# Altium PCB SY8502.PcbDoc
Units mm, origin at the board's own origin, x right, y up, seen from the top; angles counter-clockwise.
Board outline 48.77 x 24.29 mm, 2 copper layers (Top Layer, Bottom Layer), stack 1.611 mm thick; 23 components, 13 nets, 62 pads, 105 vias.
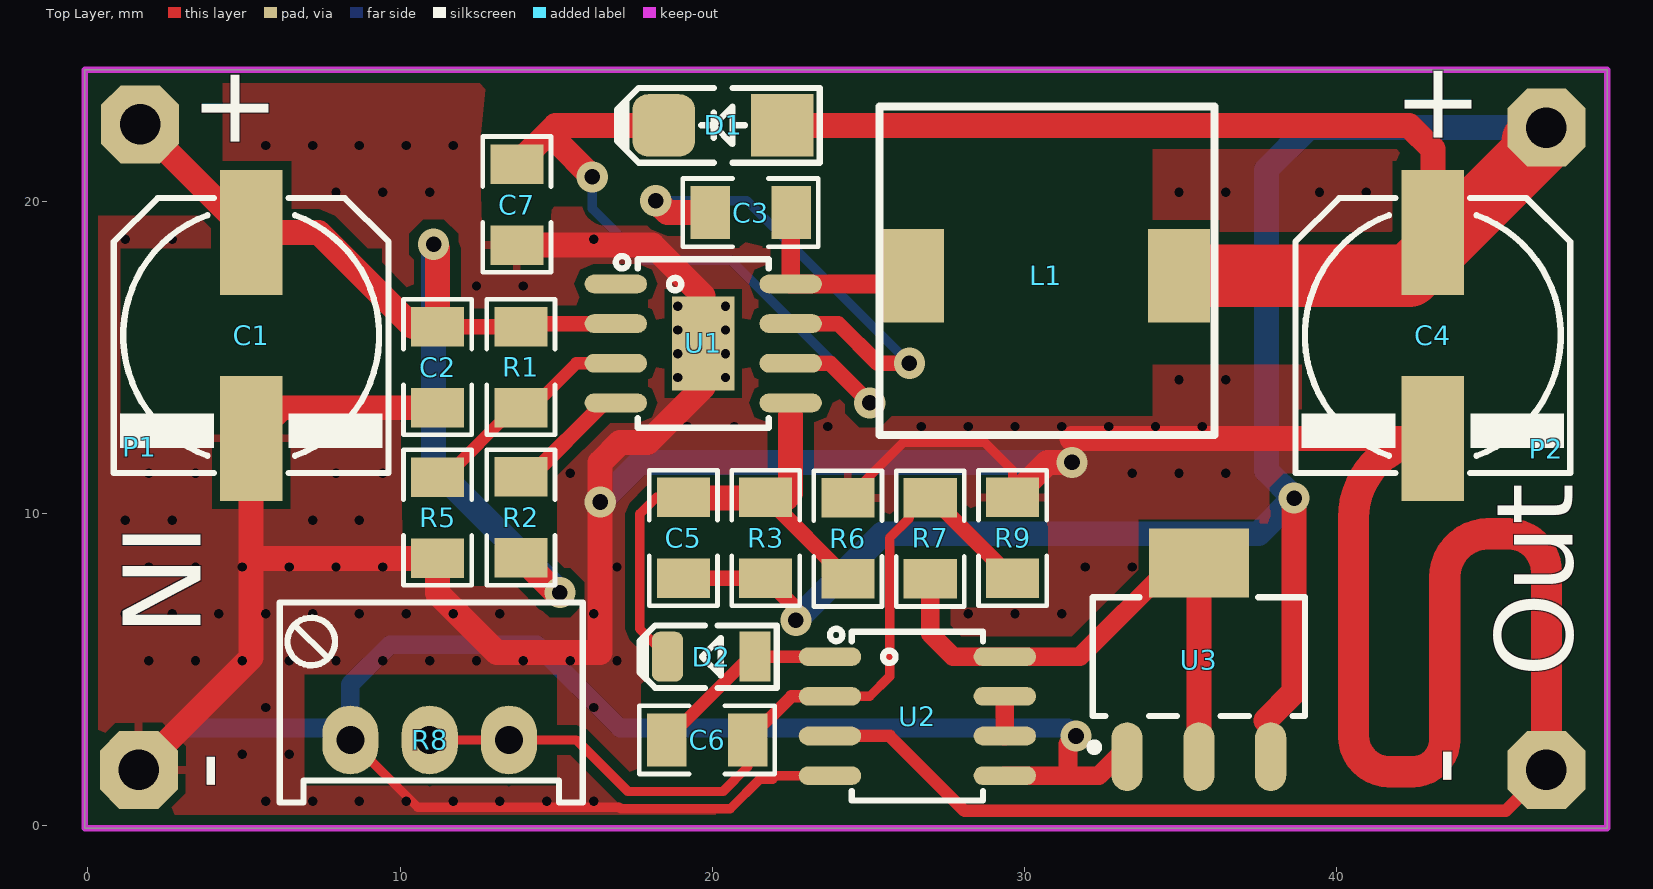
[diagram p0: Top Layer view]
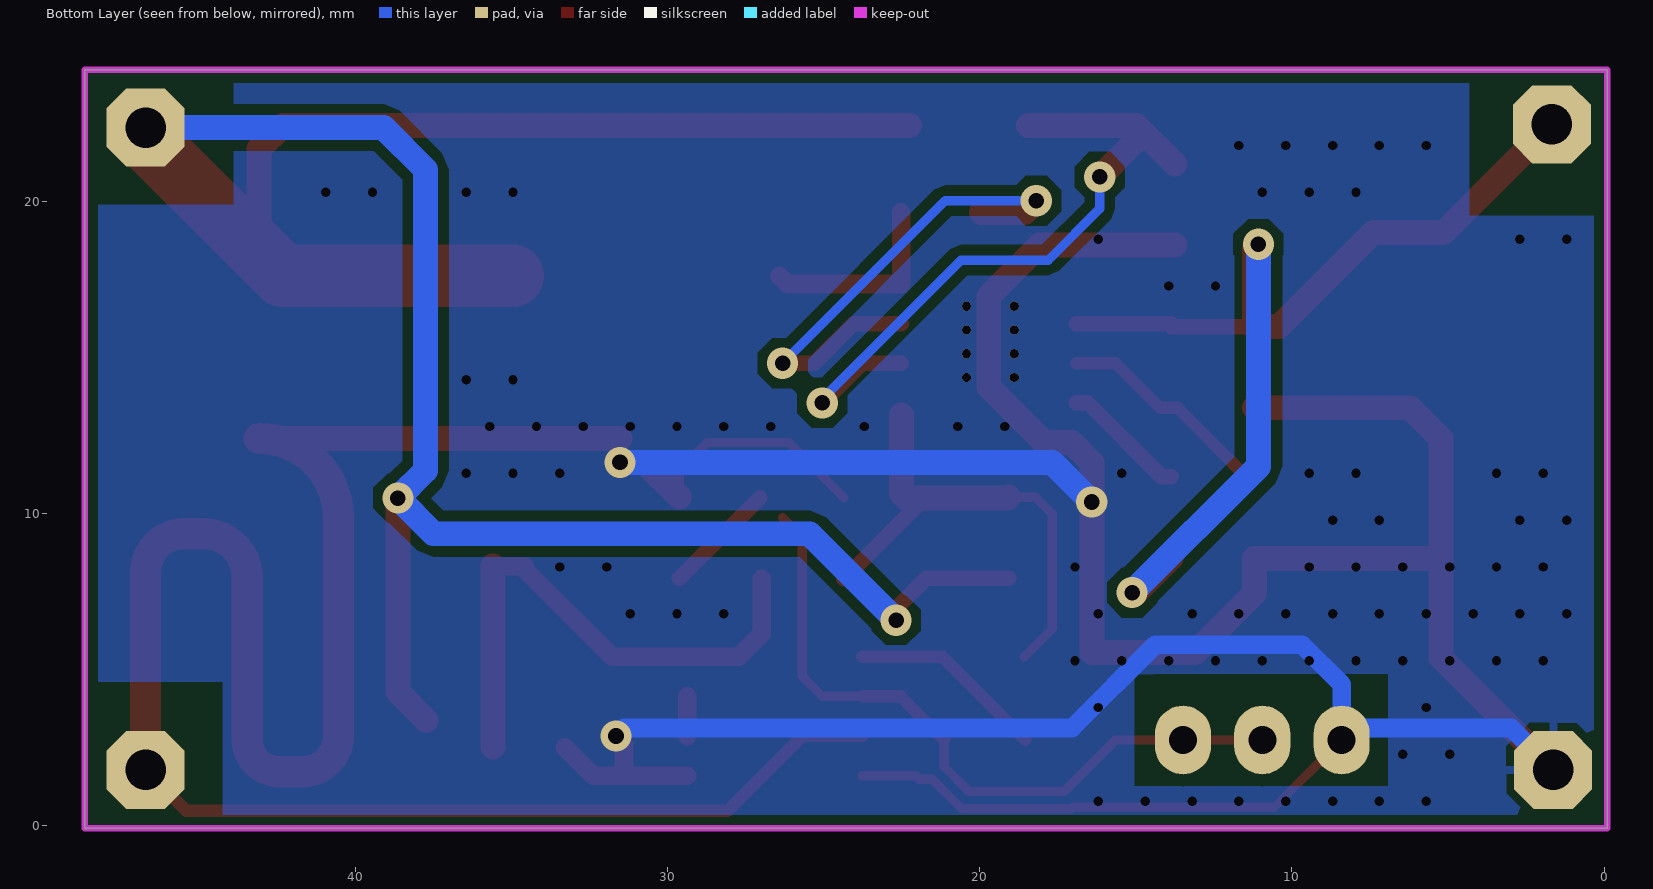
[diagram p1: Bottom Layer view, seen from below]
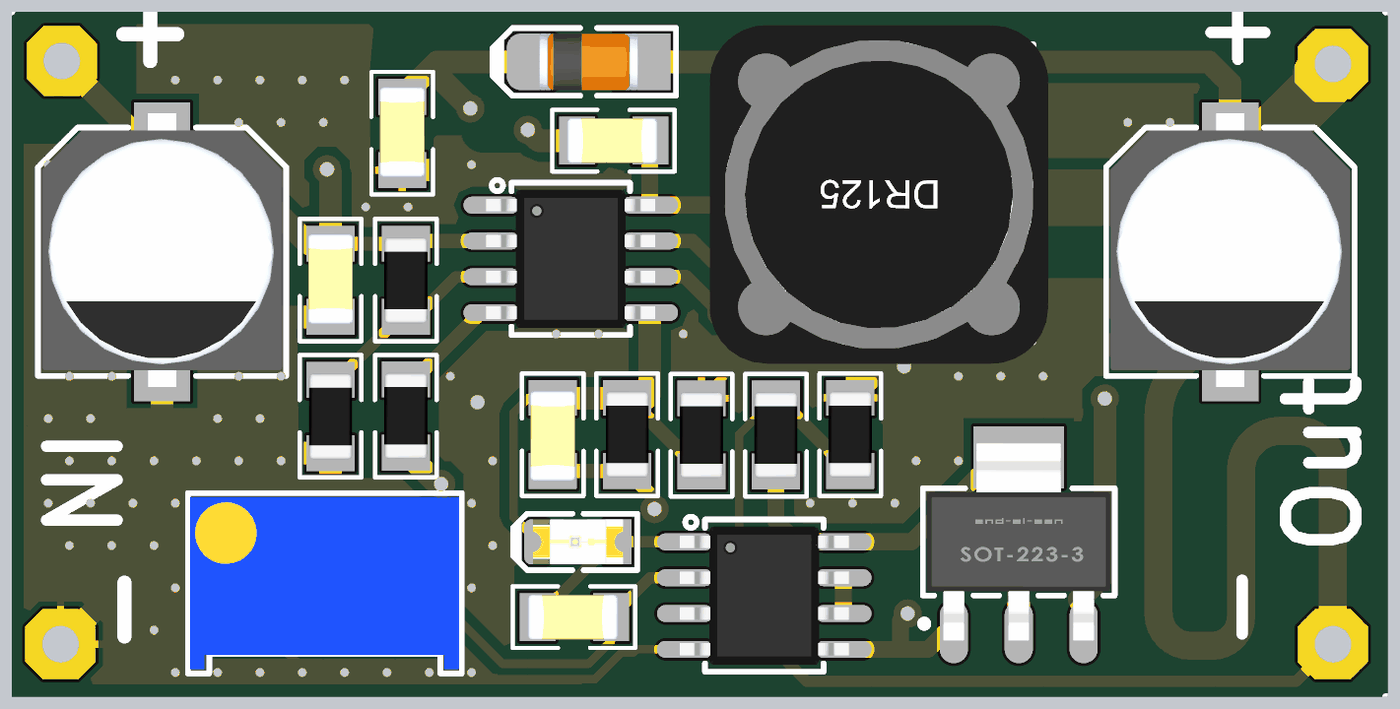
[diagram p2: 3D render of the assembled board from above, using the file's embedded part models]

## Layer stack, top to bottom
Top Solder: solder mask 0.0102, Solder Resist, Dk 3.5
Top Layer: signal copper 0.0356
Dielectric 1: dielectric 1.54, FR-4, Dk 4.8
Bottom Layer: signal copper 0.0356
Bottom Solder: solder mask 0.0102, Solder Resist, Dk 3.5

## Board outline
-0.102,-0.083 -0.102,24.206 48.666,24.206 48.666,-0.083

## Design rules (kind name [scope] priority, off if disabled: settings)
Clearance [All] p1: gap=0.3 ignorepadtopadclearanceinfootprint=FALSE
PlaneConnect [All] p1: pad.planeconnectstyle=Relief pad.reliefexpansion=0.508 pad.reliefentries=4 pad.reliefconductorwidth=0.254 pad.reliefairgap=0.254 via.planeconnectstyle=Direct via.reliefexpansion=0.508 via.reliefentries=4 via.reliefconductorwidth=0.254 via.reliefairgap=0.254
PolygonConnect PolygonConnect_2 [All vs IsNamedPolygon('GND')] p1: thpad.connectstyle=Relief thpad.reliefconductorwidth=0.254 thpad.reliefentries=4 thpad.polygonreliefangle="90 Angle" thpad.airgapwidth=0.254 smdpad.connectstyle=Relief smdpad.reliefconductorwidth=0.254 smdpad.reliefentries=4 smdpad.polygonreliefangle="90 Angle" smdpad.airgapwidth=0.254 via.connectstyle=Direct via.reliefconductorwidth=0.254 via.reliefentries=4 via.polygonreliefangle="90 Angle" via.airgapwidth=0.254
PolygonConnect PolygonConnect_1 [All vs IsNamedPolygon('GND')] p2: thpad.connectstyle=Relief thpad.reliefconductorwidth=0.254 thpad.reliefentries=4 thpad.polygonreliefangle="90 Angle" thpad.airgapwidth=0.254 smdpad.connectstyle=Relief smdpad.reliefconductorwidth=0.254 smdpad.reliefentries=4 smdpad.polygonreliefangle="90 Angle" smdpad.airgapwidth=0.254 via.connectstyle=Direct via.reliefconductorwidth=0.254 via.reliefentries=4 via.polygonreliefangle="90 Angle" via.airgapwidth=0.254
PolygonConnect [All] p3: connectstyle=Relief reliefconductorwidth=0.254 reliefentries=4 polygonreliefangle="90 Angle" airgapwidth=0.254
RoutingVias [All] p1: holewidth=0.711 width=1.27 viastyle="Through Hole" minholewidth=0.711 minwidth=1.27 maxholewidth=0.711 maxwidth=1.27
SolderMaskExpansion [All] p1: expansion=0.102 istentingtop=FALSE
Width [All] p1: maxlimit=2 minlimit=0.3 preferedwidth=0.8
29 further rules are at their usual default settings.

## Components (designator, comment, footprint, x,y, rotation, side; value= is the part's Value field where it differs from the comment)
C1 "100uF/100V" C_EL_8 5.232,15.697 r270 top
C2 "100nF/100V" 1206-Cap-S 11.201,14.681 r0 top
C3 "100nF" 1206-Cap-S 21.234,19.634 r90 top
C4 "470uF/16V" C_EL_8 43.078,15.697 r270 top
C5 "47pF" 1206-Cap-S 19.075,9.22 r180 top
C6 "100pF" 1206-Cap-S 19.837,2.743 r90 top
C7 "100nF" 1206-Cap-S 13.741,19.888 r0 top
D1 "Diode 1N4148" D1808 20.345,22.428 r180 top
D2 "LED0" LED1206GRN 19.967,5.41 r180 top
L1 "68uH" Bobin_smd_10*10 31.14,18.11 r180 top
P1 "Input" HDR1X2#1 1.422,7.315 r90 top
P2 "Input" HDR1X2#2 46.507,8.331 r90 top
R1 "100K" 1206-Res-S 13.868,14.681 r0 top
R2 "1.8M" 1206-Res-S 13.868,9.875 r180 top
R3 "18K" 1206-Res-S 21.711,9.22 r180 top
R5 "NA" 1206-Res-S 11.201,9.855 r0 top
R6 "2K" 1206-Res-S 24.346,9.2 r180 top
R7 "470K" 1206-Res-S 26.981,9.2 r180 top
R8 "RPot" POT_3296W 10.947,2.743 r0 top value=10K
R9 "NA" 1206-Res-S 29.616,9.22 r180 top
U1 "SY8502" SO_8T 19.71,15.443 r0 top
U2 "LM358D" SO_8 26.568,3.505 r0 top
U3 "LM1117IMP-5.0" SOT223_4 35.585,5.41 r90 top

## Footprints (in the part's own frame and the unit in brackets; to place one, negate y for a bottom-side part, rotate by r counter-clockwise, add the part's x,y. Pads: shape width x height; smd on the part's side, far side on the other; paste and mask are expansions set on the pad)
1206-Cap-S [mm]
  rect 1.7x1.27 smd: 1(0,-1.298) 2(0,1.298)
  silkscreen extent -1.09,-2.16 1.09,2.18, body extent -0.8,-1.55 0.8,1.65, height 0.94
1206-Res-S [mm]
  rect 1.7x1.27 smd: 1(0,-1.298) 2(0,1.298)
  silkscreen extent -1.09,-2.16 1.09,2.18, body extent -0.76,-1.52 0.76,1.52, height 0.6
Bobin_smd_10*10 [mm]
  rect 2x3 smd: 1(4.722,0.501) 2(-3.808,0.501)
  silkscreen extent -4.94,-4.92 5.79,5.6, body extent -5.49,-5.62 6.51,6.38, height 5.92
C_EL_8 [mm] "Electrolytic Cap, Size E, Size F, 8.3X10"
  rect 4x2 smd: 1(-3.3,0) 2(3.3,0)
  Top Layer pour cut-out: 2.794,4.191 2.794,-4.191 -2.794,-4.191 -2.794,4.191
  silkscreen extent -4.4,-4.4 4.4,4.4, body extent -4.9,-4.25 4.8,4.25, height 10.3
D1808 [mm] "MELF, DIOD1810, SOD-87"
  rect 2x2 smd: 1(-1.9,0)
  rrect50% 2x2 smd: 2(1.9,0)
  Top Layer pour cut-out: -1.3,1.27 1.3,1.27 1.3,-1.27 -1.3,-1.27
  silkscreen extent -3.1,-1.2 3.4,1.2, body extent -1.75,-1 1.75,1, height 2
HDR1X2#1 [mm] "Connector; Header; 2 Position"
  oct 2.5x2.5 hole 1.3: 1(-5.533,-0.21) 2(15.145,-0.254)
HDR1X2#2 [mm] "Connector; Header; 2 Position"
  oct 2.5x2.5 hole 1.3: 1(-6.549,-0.21) 2(14.025,-0.21)
LED1206GRN [mm] "LED, 1206, GREEN"
  rect 1x1.6 smd mask+0.075: 1(-1.4,0)
  rrect50% 1x1.6 smd mask+0.075: 2(1.4,0)
  Top Layer pour cut-out: -1.1,1.1 -1.1,-1.1 1.1,-1.1 1.1,1.1
  silkscreen extent -2.1,-1 2.3,1, body extent -1.6,-0.8 1.6,0.8, height 0.68
POT_3296W [mm] "POT, TRIM, 10.0X5.0mm, pitch: 2.5mm 3299W 3296W S64W"
  oval 1.8x2.2 hole 0.9: 1(-2.54,0) 2(0,0) 3(2.54,0)
  silkscreen extent -4.8,-2 4.9,4.4, body extent -4.73,-1.85 4.8,4.25, height 11.56
SO_8 [mm] "SOP-8, 5x3.9mm body 1.27mm pitch, SOT96-1, M08A, S8, SOIC8, VO8, MS-012AA(JEDEC), R-8, 8S2, VOG8"
  oval 2x0.6 smd: 1(-2.8,1.905) 2(-2.8,0.635) 3(-2.8,-0.635) 4(-2.8,-1.905) 5(2.8,-1.905) 6(2.8,-0.635) 7(2.8,0.635) 8(2.8,1.905)
  silkscreen extent -2.8,-2.7 2.1,2.8, body extent -3,-2.45 3,2.45, height 1.7
SO_8T [mm] "SOP-8, 5x3.9mm body 1.27mm pitch, DDA, SO PowerPAD"
  oval 2x0.6 smd: 1(-2.8,1.905) 2(-2.8,0.635) 3(-2.8,-0.635) 4(-2.8,-1.905) 5(2.8,-1.905) 6(2.8,-0.635) 7(2.8,0.635) 8(2.8,1.905)
  rect 2x3 smd mask+0.1: 9(0,0)
  silkscreen extent -2.8,-2.7 2.1,2.8, body extent -3,-2.45 3,2.45, height 1.7
SOT223_4 [mm] "SOT223, 4-Leads, Body 6.5x3.5mm, Pitch 2.30mm"
  oval 2.2x1 smd: 1(-3.2,2.3) 2(-3.2,0) 3(-3.2,-2.3)
  rect 2.2x3.2 smd: 4(3,0)
  Top Layer pour cut-out: -1.7,3.556 1.7,3.556 1.7,-3.556 -1.7,-3.556
  silkscreen extent -3.02,-3.4 1.9,3.47, body extent -3.5,-3.25 3.5,3.25, height 1.7

## Part data
C1 C4: library part "Cap Pol1", "Polarized Capacitor (Radial)", LatestRevisionDate=17-Jul-2002, LatestRevisionNote="Re-released for DXP Platform.", PackageDescription="Polarized Capacitor (Radial); 2 Leads", PackageReference=RB7.6-15, Published=8-Jun-2000, Publisher="Altium Limited"
C2 C3 C5 C6 C7: library part Cap, "Capacitor", LatestRevisionDate=17-Jul-2002, LatestRevisionNote="Re-released for DXP Platform.", PackageDescription="Radial Cap, Thru-Hole; 2 Leads; 0.3 in Pin Spacing", PackageReference=RAD-0.3, Published=8-Jun-2000, Publisher="Altium Limited"
D1: "High Conductance Fast Diode", Code_JEDEC=DO-204-AH, ComponentLink1Description="Manufacturer Link", ComponentLink1URL=http://www.fairchildsemi.com/, ComponentLink2Description=Datasheet, ComponentLink2URL=http://www.fairchildsemi.com/ds/1N%2F1N4148.pdf, DatasheetVersion=1997, LatestRevisionDate=17-Jul-2002, LatestRevisionNote="Re-released for DXP Platform.", PackageDescription="Diode, Axial; Body 3.8 x 1.9 mm (LxDia. max), Lead Dia. 0.53 mm (max)", PackageReference=DO-35, Published=8-Jun-2000, Publisher="Altium Limited"
D2: "Typical INFRARED GaAs LED", LatestRevisionDate=08-Jul-2005, LatestRevisionNote="Mech Layer 1 removed.", PackageDescription="LED; 2 Leads", PackageReference=LED-0, Published=8-Jun-2000, Publisher="Altium Limited"
L1: library part Inductor, "Inductor", Code_IEC=1005, Code_JEITA=0402, LatestRevisionDate=29-May-2009, LatestRevisionNote="IPC-7351 Footprint Added.", PackageDescription="Chip Inductor", PackageReference=0402-A, Published=8-Jun-2000, Publisher="Altium Limited"
P1 P2: library part "Header 2", "Header, 2-Pin", LatestRevisionDate=17-Jul-2002, LatestRevisionNote="Re-released for DXP Platform.", Publisher="Altium Limited"
R1 R2 R3 R5 R6 R7 R9: library part Res1, "Resistor", LatestRevisionDate=17-Jul-2002, LatestRevisionNote="Re-released for DXP Platform.", PackageDescription="Axial Device, Thru-Hole; 2 Leads; 0.3 in Pin Spacing", PackageReference=AXIAL-0.3, Published=8-Jun-2000, Publisher="Altium Limited"
R8: "Potentiometer", LatestRevisionDate=17-Jul-2002, LatestRevisionNote="Re-released for DXP Platform.", PackageDescription="Variable Resistor, Thru-Hole; 3 Leads", PackageReference=VR5, Published=8-Jun-2000, Publisher="Altium Limited", Set Position=0.5, Sim Note="Enter the Resistance value and the set point into parameter fields."
U1: "Step Down Regulator"
U2: "Dual Low-Power Operational Amplifier", Code_IPC=SOIC127P600-8, Code_JEDEC=MS-012-AA, ComponentLink1Description="Manufacturer Link", ComponentLink1URL=http://www.onsemi.com/site/products/parametrics/0,4446,251,00.html, ComponentLink2Description=Datasheet, ComponentLink2URL=http://www.onsemi.com/pub/Collateral/LM358-D.PDF, DatasheetVersion=1988, LatestRevisionDate=13-Apr-2006, LatestRevisionNote="IPC-7351 Footprint Added.", PackageDescription="8-Pin Small Outline Integrated Circuit 1.27 mm Pitch", PackageReference=751-02, Published=17-Jul-2002, Publisher="Altium Limited"
U3: "800mA Low-Dropout Linear Regulator, 4-pin SOT-223", Manufacturer="National Semiconductor", PackageTopMarking=XYTT*N06B, PowerWise=N, Supplier Part Number 1=7614135, Code_IPC=SOT223-4, Code_JEDEC=TO-261-AA, ComponentLink1Description="LM1117 Datasheet", ComponentLink1URL=http://www.national.com/ds/LM/LM1117.pdf, ComponentLink2Description="LM1117 Web Page", ComponentLink2URL=http://www.national.com/pf/LM/LM1117.html, ComponentLink3Description="MP04A Package Page", ComponentLink3URL=http://www.national.com/packaging/folders/mp04a.html, CompType="LDO IC", DatasheetVersion=Apr-2006, PackageDescription="Molded SOT-223, 6.50 x 3.56 x 1.6mm Body, 4 Lead, 2.3mm Pitch", PackageReference=MP04A, PackageVersion="revB, Apr-2003", PartNumber=LM1117IMP-5.0, PinCount=4, Published=4-Dec-2008, Publisher="Altium Limited", RoHS=N, Supplier 1=Farnell

## Via types
v1: diameter 0/0 (per signal layer), hole 0.3, Top Layer to Bottom Layer, tented both sides, 86 vias
v2: diameter 1, hole 0.5, Top Layer to Bottom Layer, tented both sides, 11 vias
v3: diameter 0.3, hole 0.3, Top Layer to Bottom Layer, tented both sides, 8 vias

## Nets (pads, with @x,y where several pads share a name; then routed paths per layer and width w, separated by ;. In a path a pad name is that pad's centre, name@x,y a point inside that pad or via, vN(x,y) a via of type N, cw(c..) or ccw(c..) an arc to the next point about the centre after c; other vN are vias at no path point)
+5V: R7.2 U2.8 U3.2 U3.4 | length 17.7
  Top Layer w0.6: R7.2 26.981,6.14 27.711,5.41 U2.8 31.775,5.41 34.675,8.31 U3.4@35.585,8.31
  Top Layer w0.8: U3.2@35.585,2.51 U3.4@35.585,8.31
+Vout: C4.1 C5.2 D1.1 L1.2 P2.2 R3.2 U3.3 | length 88.3
  Top Layer w0.5: C5.2 R3.2 22.631,7.001 22.631,6.553 22.653,6.574 v2(22.678,6.574)
  Top Layer w0.8: D1.1 42.316,22.428 43.078,21.666 C4.1 ; 37.727,3.368 38.633,4.274 v2(38.633,10.49)
  Top Layer w2: L1.2 42.325,17.609 46.717,22.001 P2.2 P2.2@46.281,21.92
  Bottom Layer w0.8: v2(22.678,6.574) 25.451,9.347 37.49,9.347 v2(38.633,10.49) 37.744,11.379 37.744,21.006 39.095,22.357 P2.2
GND: C1.2 C2.1 C4.2 C7.1 P1.1 P2.1 R5.1 R6.1 R8.1 R9.1 U1.9 U2.3 U2.4 U2.5 U3.1 | length 200.8
  Top Layer w0.3: R8.1 10.566,0.584 17.022,0.584 17.068,0.538 20.575,0.538 21.526,1.489 21.938,1.489 22.049,1.6 U2.4 ; R6.1 26.116,12.268 28.727,12.268 29.616,11.379 R9.1
  Top Layer w0.4: U2.3 25.679,2.87 28.078,0.471 45.406,0.471 P2.1
  Top Layer w0.6: U2.5 31.394,1.6 ; v2(31.648,2.87) 31.394,2.616 31.394,1.6 ; U3.1@33.285,2.51 32.375,1.6 31.394,1.6
  Top Layer w0.8: P1.1 5.232,5.383 5.232,8.714 ; C2.1 6.218,13.383 C1.2 5.232,8.714 ; C7.1 18.087,18.59 19.71,16.967 U1.9 19.71,14.046 17.932,12.268 17.043,12.268 16.408,11.633 v2(16.408,10.363) 16.408,5.537 13.106,5.537 11.201,7.442 R5.1 5.389,8.557 5.232,8.714 ; R9.1 30.731,11.633 v2(31.521,11.633) ; 31.521,12.397 C4.2
  Top Layer w1: C4.2 ccw(c43.078,9.857) 40.538,9.857 40.538,2.87 ccw(c41.681,2.87) 41.681,1.727 42.443,1.727 ccw(c42.443,2.743) 43.459,2.743 43.459,7.95 cw(c44.856,7.95) 44.856,9.347 45.491,9.347 cw(c45.491,8.121) 46.717,8.121 P2.1
  Bottom Layer w0.6: P1.1 2.974,3.124 R8.1@8.407,3.124 ; R8.1 R8.1@8.407,3.124 ; v2(31.648,2.87) 31.394,3.124 17.043,3.124 14.376,5.791 9.677,5.791 8.407,4.521 R8.1@8.407,3.124
  Bottom Layer w0.8: v2(16.408,10.363) 17.678,11.633 v2(31.521,11.633)
  other v1: 5.697,0.781 7.197,0.781 8.697,0.781 10.197,0.781 11.697,0.781 13.197,0.781 14.697,0.781 16.197,0.781 4.947,2.281 6.447,2.281 5.697,3.781 16.197,3.781 1.947,5.281 3.447,5.281 4.947,5.281 6.447,5.281 7.947,5.281 9.447,5.281 10.947,5.281 12.447,5.281 13.947,5.281 15.447,5.281 16.947,5.281 1.197,6.781 2.697,6.781 4.197,6.781 5.697,6.781 7.197,6.781 8.697,6.781 10.197,6.781 11.697,6.781 13.197,6.781 16.197,6.781 28.197,6.781 29.697,6.781 31.197,6.781 1.947,8.281 3.447,8.281 4.947,8.281 6.447,8.281 7.947,8.281 9.447,8.281 16.947,8.281 31.947,8.281 33.447,8.281 1.197,9.781 2.697,9.781 7.197,9.781 8.697,9.781 1.947,11.281 3.447,11.281 7.947,11.281 9.447,11.281 15.447,11.281 33.447,11.281 34.947,11.281 36.447,11.281 19.197,12.781 20.697,12.781 23.697,12.781 26.697,12.781 28.197,12.781 29.697,12.781 31.197,12.781 32.697,12.781 34.197,12.781 35.697,12.781 34.947,14.281 36.447,14.281 12.447,17.281 13.947,17.281 1.197,18.781 2.697,18.781 16.197,18.781 7.947,20.281 9.447,20.281 10.947,20.281 34.947,20.281 36.447,20.281 39.447,20.281 40.947,20.281 5.697,21.781 7.197,21.781 8.697,21.781 10.197,21.781 11.697,21.781
  other v3: 18.898,14.351 20.422,14.351 18.898,15.113 20.422,15.113 18.898,15.875 20.422,15.875 18.898,16.637 20.422,16.637
NetC3_1: C3.1 L1.1 U1.8 | length 6.3
  Top Layer w0.6: C3.1 22.51,19.612 U1.8 26.158,17.348 L1.1
NetC3_2: C3.2 U1.7 | length 16.5
  Top Layer w0.5: U1.7 24.028,16.078 25.298,14.808 v2(26.314,14.808)
  Top Layer w0.8: v2(18.186,20.015) 18.567,19.634 C3.2
  Bottom Layer w0.3: v2(18.186,20.015) 21.107,20.015 v2(26.314,14.808)
NetC5_1: C5.1 D2.2 R3.1 R6.2 U1.5 | length 16.3
  Top Layer w0.3: D2.2 17.678,6.299 17.678,9.982 18.214,10.518 C5.1 ; R3.1 21.73,10.518 R3.1@21.75,10.498
  Top Layer w0.5: R3.1@21.75,10.498 R6.2
  Top Layer w0.8: C5.1 19.096,10.498 21.75,10.498 22.377,10.498 22.51,10.631 22.51,13.157
NetC6_1: C6.1 R7.1 R8.2 R8.3 R9.2 U2.2 | length 26.5
  Top Layer w0.3: R8.2 15.646,2.743 17.297,1.092 20.345,1.092 21.135,1.882 C6.1 ; U2.2 25.044,4.14 25.679,4.775 25.679,9.22 26.314,9.855 ; R7.1 R7.1@27.041,10.498
  Top Layer w0.4: C6.1 22.532,4.14 U2.2
  Top Layer w0.5: R7.1@27.041,10.498 R9.2
NetC6_2: C6.2 D2.1 U2.1 | length 6.3
  Top Layer w0.4: C6.2 21.206,5.41 D2.1 U2.1
NetC7_2: C7.2 D1.2 U1.6 | length 23
  Top Layer w0.5: U1.6 23.774,14.808 v2(25.044,13.538)
  Top Layer w0.8: C7.2 14.983,22.428 ; v2(16.154,20.777) 14.983,21.948 14.983,22.428 ; D1.2 14.983,22.428
  Bottom Layer w0.3: v2(16.154,20.777) 16.154,19.761 17.805,18.11 20.599,18.11 24.917,13.792 24.917,13.665 v2(25.044,13.538)
NetR1_1: R1.1 R5.2 U1.3 | length 7.2
  Top Layer w0.4: R5.2 11.433,11.153 13.663,13.383 R1.1 14.221,13.383 15.646,14.808 U1.3
NetR2_1: R2.1 U1.4 | length 4
  Top Layer w0.5: R2.1 14.171,11.173 16.535,13.538 U1.4
NetU2_6: U2.6 U2.7 | length 1.3
  Top Layer w0.6: U2.6 U2.7
VCC: C1.1 C2.2 P1.2 R1.2 R2.2 U1.2 | length 35.2
  Top Layer w0.5: C2.2 R1.2 ; R1.2@13.868,16.078 U1.2
  Top Layer w0.8: P1.2 5.138,18.997 C1.1 7.393,18.997 10.411,15.979 C2.2 11.201,18.491 v2(11.074,18.618) ; R2.2 14.985,7.461 v2(15.119,7.461)
  Bottom Layer w0.8: v2(11.074,18.618) 11.074,11.506 v2(15.119,7.461)
pads on no net: U1.1

## Polygon pours and split planes (outlines as drawn)
GND on Bottom Layer "GND" (solid, remove dead copper, pour order 1): 48.59,24.13 0.051,24.13 0.051,0 48.666,0 48.666,-0.152
GND on Top Layer "GND" (solid, remove dead copper, pour order 0): 48.59,24.206 48.59,0 0,0 0,24.206

## Keep-outs
Keep-Out Layer:
  the board outline again, w0.2

## Other copper
Top Layer:
  pour cut-out: 15.823,19.977 ccw(c16.585,19.977) 16.585,19.215 17.855,19.215 ccw(c17.855,19.242) 17.882,19.242 17.882,20.599 ccw(c17.374,20.599) 17.374,21.107 16.637,21.107
  pour cut-out: 12.591,22.121 12.802,24.435 17.805,24.435 17.958,23.19 17.501,22.53
  pour cut-out: 12.591,20.251 12.637,18.717 14.845,18.717 14.757,19.812 15.838,19.829 15.57,20.777
  pour cut-out: 17.831,4.648 17.704,4.521 17.704,3.404 18.898,3.404 19.583,4.089 19.583,4.623
  pour cut-out: 27.991,8.433 27.991,7.327 27.649,6.985 29.235,6.985 29.235,7.899 28.981,8.153
  pour cut-out: 33.553,4.597 22.885,4.572 20.396,0.381 34.722,0.076 38.151,0.229
  pour cut-out: 37.795,9.677 34.036,9.677 34.036,8.382 32.842,6.452 30.048,4.47 32.182,2.616 32.182,0.94 36.5,0.102 39.497,0.66
  pour cut-out: 10.008,13.589 15.037,13.589 15.037,7.668 10.097,7.668
  pour cut-out: 15.037,16.231 9.931,16.231 9.027,15.327 9.027,13.383 14.679,13.383 15.088,13.792
  pour cut-out: 28.778,9.881 30.469,9.881 30.766,9.583 30.766,8.857 28.898,8.857 28.575,8.534 28.328,8.781 28.328,9.21
  pour cut-out: 26.645,13.106 25.298,13.106 25.298,13.818 26.086,14.605 26.721,14.605
  pour cut-out: 33.503,14.757 39.7,14.757 40.513,15.57 39.573,16.51 39.573,17.983 32.741,17.983 32.639,17.882
  pour cut-out: 18.39,21.234 18.847,19.253 22.149,18.415 23.698,17.678 28.575,18.059 28.6,21.946 26.543,23.089 18.009,22.301
  pour cut-out: 34.112,21.92 34.112,13.106 26.645,13.106 26.645,21.946
  pour cut-out: 48.336,13.335 38.684,13.335 38.684,0.229 48.362,0.229
Multi-Layer:
  pour cut-out: 0.005,24.225 0.005,19.526 4.323,19.526 4.323,24.336
  pour cut-out: 48.567,-0.091 48.567,4.608 44.249,4.608 44.249,-0.201
  pour cut-out: 48.59,24.206 43.891,24.206 43.891,19.888 48.701,19.888
  pour cut-out: 14.402,4.851 6.934,4.851 6.934,1.27 15.037,1.27 15.037,4.826

## Silkscreen, mask and mechanical layers (free items; w line width, h text height)
Top Overlay:
  text "+" at 44.327,21.66 h2.5 r90
  text "+" at 5.796,21.531 h2.5 r90
  text "IN" at 1.112,9.658 h2.5 r270
  text "Out" at 47.554,4.743 h2.5 r90
  text "-" at 44.48,1.289 h2.5 r90
  text "-" at 4.881,1.135 h2.5 r90

## Dimensions
48.59,24.206 to 48.567,-0.091 on Top Overlay
-0.102,24.206 to 48.666,24.206 on Top Overlay